# Altium PCB N76E003_V3.5.PcbDoc
Units mm, origin at the board's own origin, x right, y up, seen from the top; angles counter-clockwise.
Board outline 19.86 x 15.25 mm, 2 copper layers (Top Layer, Bottom Layer); 32 components, 21 nets, 94 pads, 44 vias.
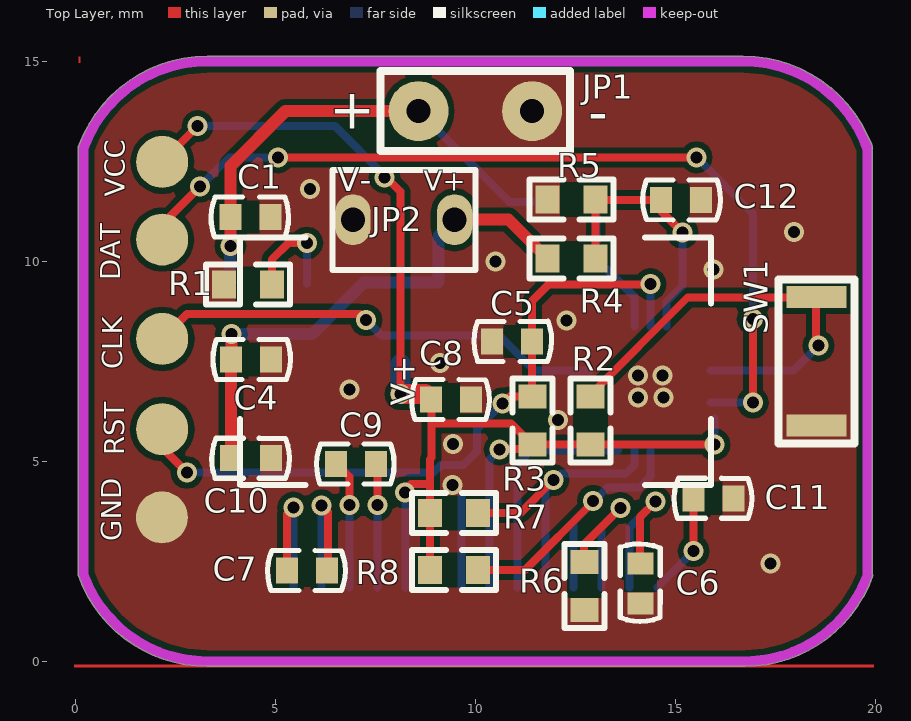
[diagram p0: Top Layer view]
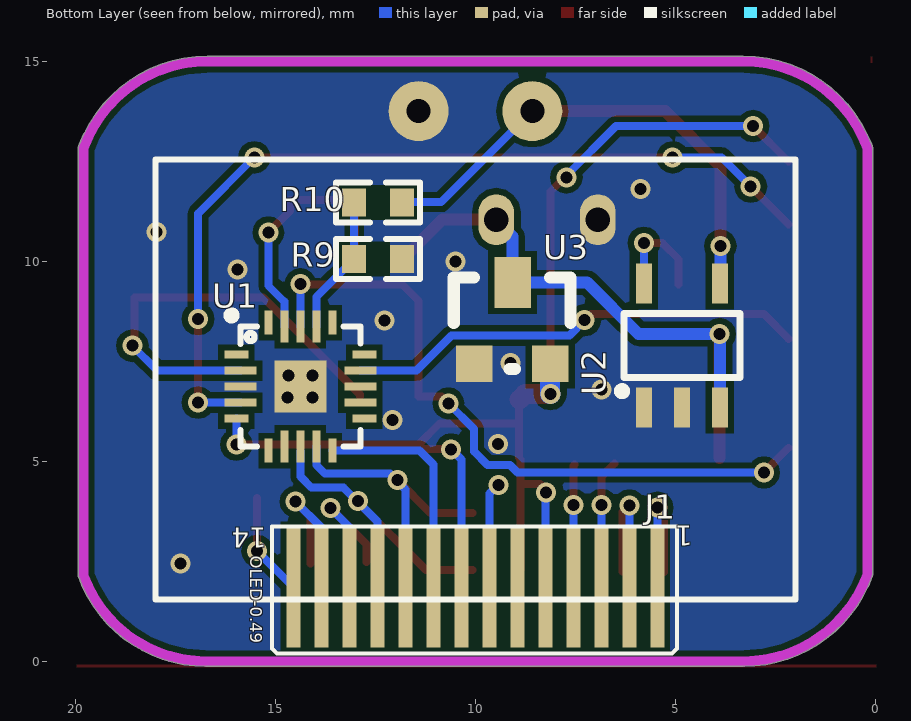
[diagram p1: Bottom Layer view, seen from below]

## Layer stack, top to bottom
Top Layer: signal copper 0.0356
Dielectric: dielectric 0.32, FR-4, Dk 4.8
Bottom Layer: signal copper 0.0356

## Board outline
0.082,2.128 cw(c0.201,2.171) 0.075,2.187 0.075,12.813 cw(c0.201,12.829) 0.075,12.845 cw(c0.202,12.843) 0.098,12.916 cw(c3.302,11.7) 3.302,15.127 16.702,15.127 cw(c16.702,11.7) 19.907,12.916 cw(c19.802,12.843) 19.93,12.845 cw(c19.803,12.829) 19.931,12.829 cw(c19.803,12.829) 19.93,12.813 19.93,2.18 cw(c19.802,2.18) 19.93,2.176 cw(c19.805,2.148) 19.933,2.148 cw(c19.805,2.148) 19.925,2.104 cw(c16.738,3.264) 16.738,-0.127 3.302,-0.127 cw(c3.302,3.3)

## Design rules (kind name [scope] priority, off if disabled: settings)
Clearance [All] p1: gap=0.15
FabricationTestPointUsage TestPointUsage [All] p1: valid=0 allowmultiple=FALSE
FabricationTestpoint Testpoint [(IsPad And (OnTopLayer Or OnBottomLayer))] p1: side=3 testpointundercomponent=TRUE minsize=1.016 maxsize=2.54 preferedsize=1.524 minholesize=0 maxholesize=1.016 preferedholesize=0.813 testpointgrid=0.025 allowsidetop=TRUE allowsidebottom=TRUE usegrid=TRUE gridtolerance=0
PlaneConnect [All] p1: planeconnectstyle=Direct reliefexpansion=0.508 reliefentries=4 reliefconductorwidth=0.254 reliefairgap=0.254
PolygonConnect [All] p1: connectstyle=Direct reliefconductorwidth=0.254 reliefentries=4 polygonreliefangle="90 Angle"
RoutingVias [All] p1: holewidth=0.3 width=0.5 viastyle="Through Hole" minholewidth=0.3 minwidth=0.5 maxholewidth=0.711 maxwidth=1.27
SilkscreenOverComponentPads [All] p1: minsilkscreentomaskgap=0.254
SolderMaskExpansion [All] p1: expansion=0.102
Width [All] p1: maxlimit=1 minlimit=0.15 preferedwidth=0.254
24 further rules are at their usual default settings.

## Components (designator, comment, footprint, x,y, rotation, side; value= is the part's Value field where it differs from the comment)
C1 "10uF" C-0402 4.379,11.112 r180 top
C4 "10uF" C-0402 4.394,7.544 r0 top
C5 "0.1uF" C-0402 10.922,8.001 r0 top
C6 "0.1uF" C-0402 14.125,1.951 r90 top
C7 "0.1uF" C-0402 5.796,2.27 r180 top
C8 "0.1uF" C-0402 9.398,6.546 r180 top
C9 "0.1uF" C-0402 7.018,4.938 r180 top
C10 "0.1uF" C-0402 4.399,5.077 r180 top
C11 "0.1uF" C-0402 15.959,4.077 r180 top
C12 "0.1uF" C-0402 15.141,11.533 r0 top
CLK "TICECLK" TP-1.3 2.174,8.062 r0 top (schematic designator *3)
DAT "TICEDAT" TP-1.3 2.174,10.544 r0 top (schematic designator *4)
GND "GND" TP-1.3 2.167,3.599 r0 top (schematic designator *1)
J1 "OLED_0.49" OLED-0.49 10.002,1.85 r0 bottom
JP1 "HEADER 2" "HED 1X2 2.84MM" 10.002,13.757 r0 top
JP2 "P2-1.27mm" HED1X2-1.27 6.942,11.039 r0 top
R1 "50K" R-0402 4.193,9.426 r0 top
R2 "50K" R-0402 12.885,6.147 r270 top
R3 "10K" R-0402 11.425,6.147 r270 top
R4 "100K" R-0402 12.283,10.066 r0 top
R5 "100K" R-0402 12.537,11.544 r180 top
R6 "300K" R-0402 12.725,1.75 r90 top
R7 "4.7K" R-0402 9.345,3.711 r0 top
R8 "4.7K" R-0402 9.345,2.281 r0 top
R9 "50K" R-0402 12.309,10.058 r0 bottom
R10 "50K" R-0402 12.56,11.476 r180 bottom
RST "VCC" TP-1.3 2.174,5.804 r0 top (schematic designator *5)
SW1 "SW-PB" SWITCH 18.525,7.5 r90 top
U1 "N76E003AQ20" "QFN-20 0.4mm" 14.381,6.868 r270 bottom
U2 "TP4054 SOT23-5" SOT-23-5 4.841,7.897 r180 bottom
U3 "PT5110E SOT23" SOT-123 9.086,8.202 r180 bottom
VCC "RESET" TP-1.3 2.174,12.487 r0 top (schematic designator *2)

## Footprints (in the part's own frame and the unit in brackets; to place one, negate y for a bottom-side part, rotate by r counter-clockwise, add the part's x,y. Pads: shape width x height; smd on the part's side, far side on the other; paste and mask are expansions set on the pad)
C-0402 [mm]
  rect 0.55x0.65 smd: 1(-0.5,0) 2(0.5,0)
  Top Layer pour cut-out: -0.228,0.419 -0.228,-0.419 0.229,-0.419 0.216,-0.406 0.216,0.419
  silkscreen extent -0.96,-0.5 0.99,0.5
HED1X2-1.27 [mil]
  oval 35x50 hole 24: 1(0,0) 2(100,0)
  silkscreen extent -20,-49 120,49
"HED 1X2 2.84MM" [mm]
  round 1.5 hole 0.6: 1(-1.42,0) 2(1.42,0)
  silkscreen extent -2.37,-1 2.37,1
OLED-0.49 [mm]
  rect 0.35x3 smd: 1(-4.55,0) 2(-3.85,0) 3(-3.15,0) 4(-2.45,0) 5(-1.75,0) 6(-1.05,0) 7(-0.35,0) 8(0.35,0) 9(1.05,0) 10(1.75,0) 11(2.45,0) 12(3.15,0) 13(3.85,0) 14(4.55,0)
  silkscreen extent -5.04,-1.52 5.09,1.66
"QFN-20 0.4mm" [mm]
  rect 0.2x0.6 smd: 1(-0.8,-1.6) 5(0.8,-1.6) 11(0.8,1.6) 15(-0.8,1.6)
  rect 0.2x0.8 smd: 2(-0.4,-1.5) 3(0,-1.5) 4(0.4,-1.5) 12(0.4,1.5) 13(0,1.5) 14(-0.4,1.5)
  rect 0.6x0.2 smd: 6(1.6,-0.8) 10(1.6,0.8) 16(-1.6,0.8) 20(-1.6,-0.8)
  rect 0.8x0.2 smd: 7(1.5,-0.4) 8(1.5,0) 9(1.5,0.4) 17(-1.5,0.4) 18(-1.5,0) 19(-1.5,-0.4)
  rect 1.3x1.3 smd: 21(0,0)
  silkscreen extent -1.88,-1.82 1.5,1.5
R-0402 [mm]
  rect 0.6x0.7 smd: 1(-0.473,0) 2(0.727,0)
  Top Layer pour cut-out: -0.178,0.445 -0.178,-0.445 0.432,-0.445 0.432,0.445
  silkscreen extent -0.92,-0.5 1.18,0.5
SOT-23-5 [mm]
  rect 0.4x1 smd: 1(-0.95,-1.55) 2(0,-1.55) 3(0.95,-1.55) 4(0.95,1.55) 5(-0.95,1.55)
  silkscreen extent -1.6,-1.24 1.45,0.8
SOT-123 [mil]
  rect 36x36 smd: 1(-37.48,-30.03) 2(37.52,-30.03)
  rect 36x50 smd: 3(0.52,49.97)
  silkscreen extent -57,-35 58,55
SWITCH [mm]
  rect 0.55x1.5 smd: 1(-1.604,0) 2(1.604,0)
  silkscreen extent -2.05,-0.95 2.05,0.95
TP-1.3 [mm]
  round 1.3 smd mask+0.102: 1(0,0)

## Part data
C1 C4 C5 C6 C7 C8 C9 C10 C11 C12: library part Cap, "Capacitor"
CLK DAT GND RST VCC: library part TP
JP1: "Header, 2-Pin"
JP2: library part "Header 2", "Header, 2-Pin"
R1 R2 R3 R4 R5 R6 R7 R8 R9 R10: library part Res1, "Resistor"
SW1: "Switch"

## Via types
v1: diameter 0.5, hole 0.3, Top Layer to Bottom Layer, tented both sides, 44 vias

## Nets (pads, with @x,y where several pads share a name; then routed paths per layer and width w, separated by ;. In a path a pad name is that pad's centre, name@x,y a point inside that pad or via, vN(x,y) a via of type N, cw(c..) or ccw(c..) an arc to the next point about the centre after c; other vN are vias at no path point)
5V: C1.2 JP1.1 R10.2 U2.4 | length 12.4
  Top Layer w0.3: v1(3.879,10.389) C1.2 ; C1.2@3.88,11.11 3.88,12.38 5.257,13.757 JP1.1
  Bottom Layer w0.2: JP1.1 10.859,11.48 R10.2@11.84,11.48
  Bottom Layer w0.3: v1(3.879,10.389) 3.87,10.38 3.87,9.48 U2.4@3.88,9.47
BAT+: C4.1 C10.2 JP2.2 R4.1 U2.3 U3.3 | length 15.1
  Top Layer w0.3: C10.2 C4.1@3.899,7.539 ; C4.1@3.9,7.55 v1(3.9,8.18) ; JP2.2@9.49,11.05 10.826,11.05 R4.1
  Bottom Layer w0.3: U2.3 3.891,8.171 v1(3.9,8.18) 5.92,8.18 7.21,9.47 9.07,9.47 9.08,9.48 9.08,10.62 JP2.2@9.49,11.03
GND: C1.1 C4.2 C5.1 C6.1 C8.1 C10.1 C11.1 C12.2 GND.1 J1.7 JP1.2 JP2.1 R1.1 R5.2 R6.1 R9.1 SW1.1 U1.3 U1.21 U2.1 U2.2 U3.1 | length 4.1
  Bottom Layer w0.2: v1@9.43,4.42 9.652,4.198 J1.7 J1.7@9.652,3.308
  other v1: 17.38,2.45 9.43,4.41 9.44,5.43 12.07,6.03 14.07,6.59 14.7,6.59 6.85,6.8 14.07,7.15 14.68,7.15 9.12,7.46 12.28,8.52 15.95,9.79 10.5,9.99 17.97,10.73 5.87,11.81
KEY: R2.1 SW1.2 U1.2 | length 10.9
  Top Layer w0.2: R2.1 12.885,6.673 15.313,9.1 18.52,9.1 18.52,7.95 v1(18.58,7.89)
  Bottom Layer w0.2: U1.2 17.958,7.268 v1(18.58,7.89)
NetC6_2: C6.2 J1.13 | length 4.1
  Top Layer w0.2: C6.2@14.12,2.44 14.12,3.61 v1(14.5,3.99)
  Bottom Layer w0.2: J1.13 13.852,3.342 v1(14.5,3.99)
NetC7_1: C7.1 J1.2 | length 3.8
  Top Layer w0.2: v1(6.152,3.898) 6.32,3.73 C7.1@6.32,2.24
  Bottom Layer w0.2: J1.2 v1(6.152,3.898)
NetC7_2: C7.2 J1.1 | length 3.7
  Top Layer w0.2: C7.2@5.29,2.23 5.29,3.68 v1(5.45,3.84)
  Bottom Layer w0.2: v1(5.45,3.84) 5.452,3.838 J1.1
NetC9_1: C9.1 J1.4 | length 3.1
  Top Layer w0.2: C9.1@7.52,4.92 7.552,4.888 v1(7.552,3.908)
  Bottom Layer w0.2: J1.4 v1(7.552,3.908)
NetC9_2: C9.2 J1.3 | length 3.2
  Top Layer w0.2: C9.2@6.52,4.95 6.85,4.62 v1(6.85,3.91)
  Bottom Layer w0.2: v1(6.85,3.91) 6.852,3.908 J1.3
NetC11_2: C11.2 J1.14 | length 2.6
  Top Layer w0.2: v1(15.46,2.758) C11.2@15.46,4.08
  Bottom Layer w0.2: J1.14 v1(15.46,2.758)
NetJ1_12: J1.12 R6.2 | length 3.9
  Top Layer w0.2: R6.2@12.72,2.48 12.72,2.92 v1(13.63,3.83)
  Bottom Layer w0.2: J1.12 13.152,3.352 v1(13.63,3.83)
NetR1_2: R1.2 U2.5 | length 2.7
  Top Layer w0.2: R1.2@4.92,9.42 4.92,10.05 5.33,10.46 v1(5.79,10.46)
  Bottom Layer w0.2: v1(5.79,10.46) 5.791,10.459 U2.5
OLED_REST: J1.9 U1.10 | length 5.7
  Bottom Layer w0.2: J1.9 11.052,4.922 11.4,5.27 U1.10@13.57,5.27
POWER_CHECK: R9.2 R10.1 U1.17 | length 3.5
  Bottom Layer w0.2: R10.1 13.033,10.057 13.98,9.11 U1.17@13.98,8.37
SCL: J1.10 R7.2 U1.9 | length 7.6
  Top Layer w0.2: R7.2@10.08,3.71 11.13,3.71 v1(11.95,4.53)
  Bottom Layer w0.2: J1.10 11.752,4.298 12.145,4.69 13.76,4.69 13.981,4.911 U1.9
SDA: J1.11 R8.2 U1.8 | length 8.3
  Top Layer w0.2: R8.2 11.241,2.281 v1@12.95,3.99
  Bottom Layer w0.2: J1.11 12.452,3.492 13.3,4.34 14.1,4.34 14.379,4.619 U1.8@14.379,5.254
  other v1: 12.94,4.01
TICECLK: CLK.1 U1.14 | length 11.6
  Top Layer w0.2: CLK.1@2.17,8.06 2.79,8.68 7.12,8.68 v1(7.27,8.53)
  Bottom Layer w0.2: v1(7.27,8.53) 7.654,8.146 10.598,8.146 11.476,7.268 U1.14
TICEDAT: DAT.1 U1.4 | length 21.8
  Top Layer w0.2: DAT.1@2.17,10.92 v1(3.12,11.87) ; v1(5.07,12.6) v1(15.53,12.6) ; v1(16.938,6.468) v1(16.938,8.558)
  Bottom Layer w0.2: v1(3.12,11.87) 3.85,12.6 v1(5.07,12.6) ; v1(15.53,12.6) 16.938,11.192 v1(16.938,8.558) ; U1.4 v1(16.938,6.468)
TICERST: C5.2 R3.1 RST.1 U1.18 | length 17.2
  Top Layer w0.2: RST.1@2.18,5.33 v1(2.79,4.72) ; v1(10.68,6.45) 10.85,6.62 11.42,6.62 11.42,9.01 11.83,9.42 14.38,9.42 v1(14.38,9.427)
  Bottom Layer w0.2: v1(2.79,4.72) 8.95,4.72 9.14,4.91 9.7,4.91 10.04,5.25 ; 10.04,5.26 10.04,5.81 v1(10.68,6.45) ; v1(14.38,9.427) 14.381,9.429 U1.18
TX: C12.1 R4.2 R5.1 U1.19 | length 6.7
  Top Layer w0.2: R4.2 R5.1@13.01,11.53 ; R5.1@13.01,11.53 14.64,11.53 14.64,11.26 v1(15.18,10.72)
  Bottom Layer w0.2: U1.19 14.781,8.991 15.18,9.39 v1(15.18,10.72) ; v1@15.18,10.73 v1(15.18,10.72) ; v1@15.181,10.719 v1(15.18,10.72)
VCC3_3: C8.2 J1.5 J1.8 R2.2 R3.2 R7.1 R8.1 U1.5 U3.2 VCC.1 | length 33.6
  Top Layer w0.2: VCC.1@2.18,12.5 v1(3.06,13.38) ; v1(7.73,12.1) 7.77,12.1 8.13,11.74 v1(8.13,6.68) ; v1(8.24,4.22) 8.24,4.28 8.39,4.43 8.87,4.43 ; R8.1 8.872,5.052 8.91,5.09 8.91,5.92 ; C8.2@8.9,6.5 8.91,6.49 8.91,5.92 ; v1@10.59,5.31 v1@10.62,5.31 ; v1(10.61,5.3) v1@10.62,5.31 ; v1@10.67,5.36 v1@10.62,5.31 ; R2.2@12.85,5.42 R3.2 ; R2.2 v1(15.98,5.42) ; 8.91,5.92 8.94,5.95 10.895,5.95 R3.2 ; v1@10.62,5.31 11.315,5.31 R3.2
  Top Layer w0.5: v1(8.13,6.68) 8.76,6.68 C8.2@8.9,6.54
  Bottom Layer w0.2: v1(3.06,13.38) 6.49,13.38 7.73,12.14 v1(7.73,12.1) ; v1(8.24,4.22) 8.24,4.255 8.252,4.268 J1.5 ; J1.8 10.352,5.042 v1(10.61,5.3) ; v1(15.98,5.42) U1.5@15.98,6.07
  Bottom Layer w0.5: v1(8.13,6.68) 8.133,6.683 U3.2
pads on no net: J1.6 U1.1 U1.6 U1.7 U1.11 U1.12 U1.13 U1.15 U1.16 U1.20

## Polygon pours and split planes (outlines as drawn)
GND on Top Overlay "Top Layer-No Net" (solid, remove dead copper): 0.07,15.09 19.93,15.09 19.95,15.07 19.97,15.05 19.97,-0.19 0.05,-0.19 -0.06,-0.08 0.07,0.05 0.07,15.09
GND on Bottom Layer "Top Layer-No Net" (solid, remove dead copper): 0.03,15.07 19.84,15.07 19.87,15.04 19.84,15.01 19.84,0.05 19.84,-0.11 19.89,-0.16 19.79,-0.06 0.05,-0.06 0.05,14.95 0.11,15.01
GND on Bottom Layer "Top Layer-No Net" (solid, remove dead copper): 0.13,15 19.83,15 19.89,15.06 19.98,14.97 19.98,-0.24 0.04,-0.24 -0.02,-0.18 0.13,-0.03 0.13,15.24
GND on Top Layer "Top Layer-No Net" (solid, remove dead copper): 0.04,15.06 20.01,15.06 20.01,-0.24 0.07,-0.24 -0.08,-0.09 0.13,0.12 0.13,15.09

## Keep-outs
Keep-Out Layer:
  lines w0.254: 0.201,2.171 ccw(c3.302,3.3) 3.302,0 16.738,0 ccw(c16.738,3.264) 19.805,2.148 ; 0.201,12.829 cw(c3.302,11.7) 3.302,15 16.702,15 cw(c16.702,11.7) 19.803,12.829 ; 0.202,2.18 0.202,12.843 ; 19.802,2.18 19.802,12.843

## Other copper
Top Layer:
  rectangle: 0.08,14.96 0.13,15.12
  rectangle: -0.03,-0.16 19.97,-0.08

## Silkscreen, mask and mechanical layers (free items; w line width, h text height)
Top Overlay:
  lines w0.15: 4.112,6.058 4.112,4.41 5.76,4.41 ; 4.112,8.942 4.112,10.59 5.76,10.59 ; 14.245,4.41 15.892,4.41 15.892,6.058 ; 14.245,10.59 15.892,10.59 15.892,8.942
  text "+" at 6.35,13.31 h1
  text "-" at 12.82,13.24 h1
  text "V+" at 8.71,11.76 h0.5
  text "V-" at 6.55,11.75 h0.6
  text "V+" at 8.49,6.39 h0.6 r90
Bottom Overlay:
  lines w0.15: 2.002,1.55 2.002,12.55 18.002,12.55 18.002,1.55 2.002,1.55

## Dimensions
3.302,15 to 3.302,0 on Keep-Out Layer
0.202,12.843 to 19.802,12.843 on Keep-Out Layer

## Text inside footprints (layer, text, board x,y; h text height)
J1: Bottom Overlay "14" at 15.219,3.336 h0.5 r180; Bottom Overlay "1" at 4.572,3.39 h0.5 r180; Bottom Overlay "OLED-0.49" at 15.637,2.639 h0.3 r90